# Altium PCB DueShieldL2.PcbDoc
Units mil, origin at the board's own origin, x right, y up, seen from the top; angles counter-clockwise.
Board outline 3828 x 4836 mil, 2 copper layers (Top Layer, Bottom Layer), stack 12.8 mil thick; 42 components, 59 nets, 236 pads, 89 vias.
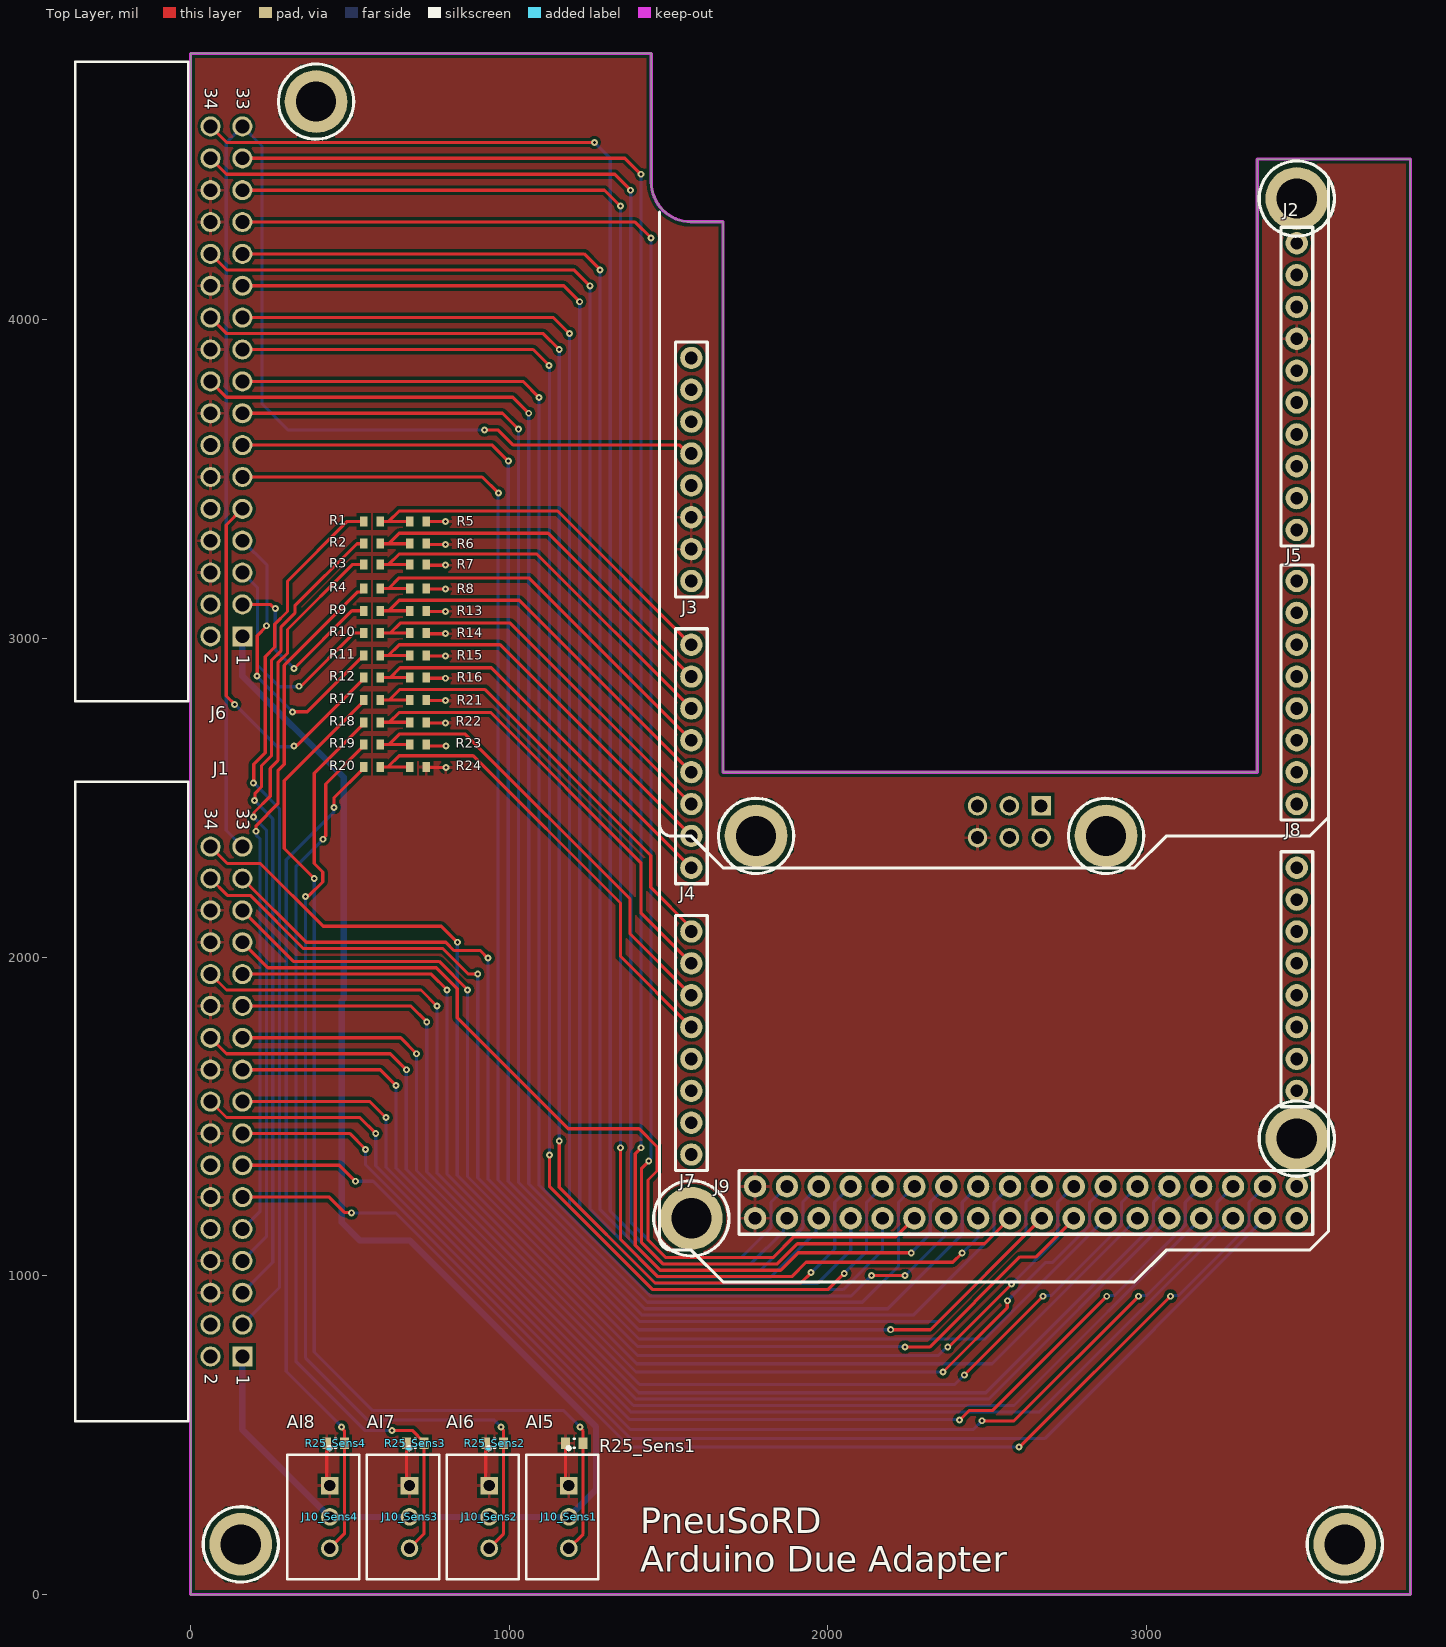
[diagram p0: Top Layer view]
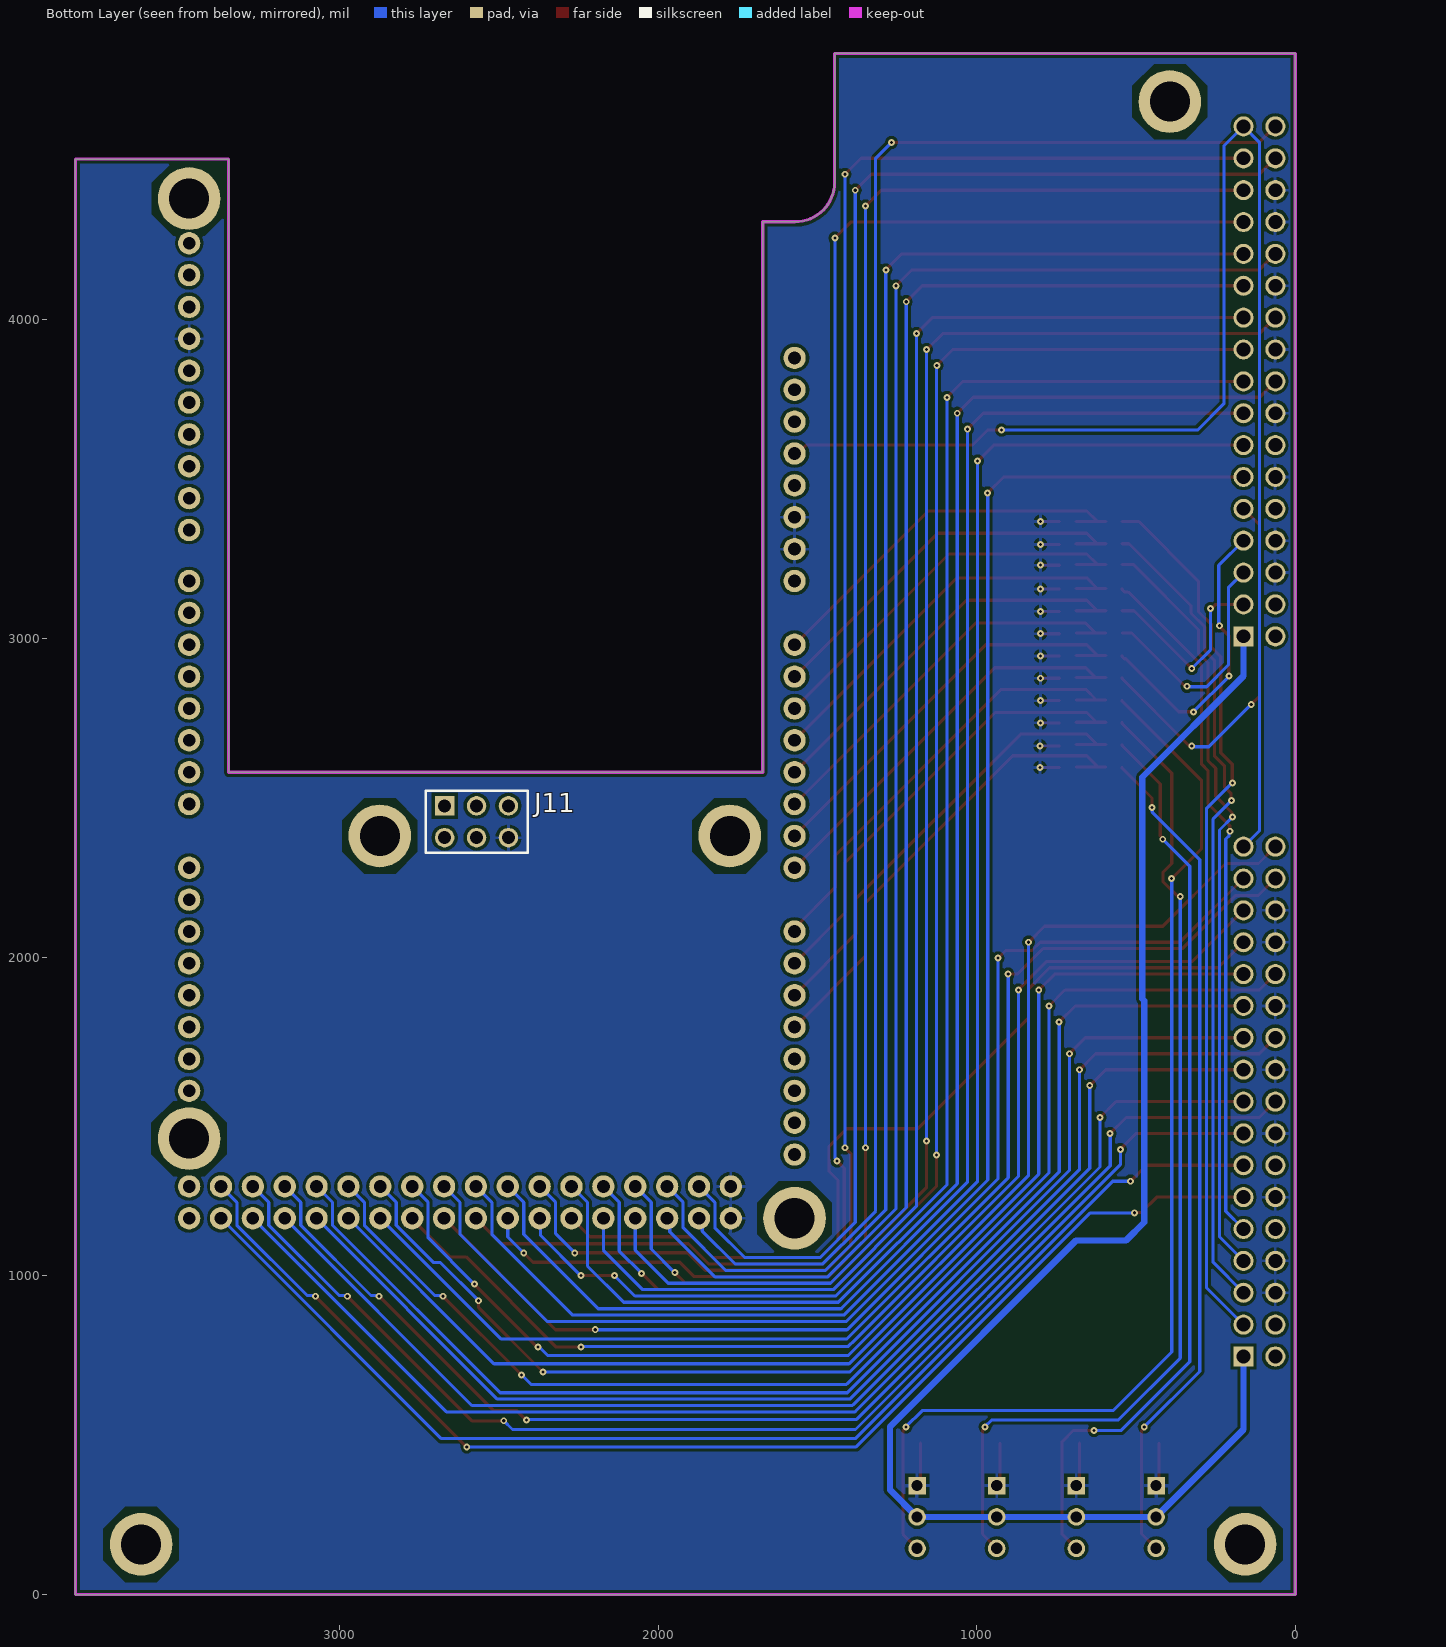
[diagram p1: Bottom Layer view, seen from below]

## Layer stack, top to bottom
Top Solder: solder mask 0.4, Solder Resist, Dk 3.5
Top Layer: signal copper 1.4
Dielectric 1: core 10, FR-4, Dk 4.2
Bottom Layer: signal copper 1.4
Solder Side: solder mask 0.4, Solder Resist, Dk 3.5

## Board outline
0.28,-0.26 0.28,4835.62 0.4,4835.74 1446.06,4835.74 1446.06,4431.57 ccw(c1570.07,4431.57) 1570.07,4307.55 1671.24,4307.55 1671.24,2579.65 1671.24,2580.39 3347.63,2580.39 3347.63,4504.4 3828.28,4504.4 3828.28,-0.26

## Design rules (kind name [scope] priority, off if disabled: settings)
BoardOutlineClearance [All] p1 off: gap=27.56 ignorepadtopadclearanceinfootprint=FALSE except(0: Arc-SplitContinuation Track-SplitContinuation SMDPad-SplitContinuation THPad-SplitContinuation Via-SplitContinuation Fill-SplitContinuation Poly-SplitContinuation Region-SplitContinuation Text-SplitContinuation)
Clearance Clearance_1 [All] p1: gap=10 ignorepadtopadclearanceinfootprint=FALSE except(0: Arc-Hole Track-Hole SMDPad-Hole THPad-Hole Via-Hole Fill-Hole Poly-Hole Region-Hole Text-Hole)
Clearance "Polygon Clearance" [InPolygon] p2: gap=15 ignorepadtopadclearanceinfootprint=TRUE
HoleSize [All] p1: absolutevalues=TRUE maxlimit=125.98 minlimit=1 maxpercent=80.000 minpercent=20.000
PolygonConnect [All] p1: connectstyle=Relief reliefconductorwidth=10 reliefentries=4 polygonreliefangle="90 Angle" airgapwidth=10
RoutingVias RoutingVias_2 [InNetClass('HC4')] p1: holewidth=31.5 width=59.06 viastyle="Through Hole" minholewidth=31.5 minwidth=59.06 maxholewidth=31.5 maxwidth=59.06
RoutingVias RoutingVias_1 [InNetClass('HC')] p2: holewidth=15.75 width=27.56 viastyle="Through Hole" minholewidth=15.75 minwidth=27.56 maxholewidth=15.75 maxwidth=27.56
RoutingVias [All] p3: holewidth=9.84 width=21.65 viastyle="Through Hole" minholewidth=9.84 minwidth=21.65 maxholewidth=9.84 maxwidth=21.65
SolderMaskExpansion [All] p1: expansion=4 istentingtop=FALSE
Width Width_2 [InNetClass('HC4')] p1: maxlimit=100 minlimit=40 preferedwidth=60 bottomlayer_minwidth=50 minimp=50.000000 maximp=50.000000 favimp=50.000000
Width Width_1 [InNetClass('HC')] p2: maxlimit=100 minlimit=30 preferedwidth=50 minimp=50.000000 maximp=50.000000 favimp=50.000000
Width [All] p3: maxlimit=20 minlimit=10 preferedwidth=15 minimp=50.000000 maximp=50.000000 favimp=50.000000
29 further rules are at their usual default settings.

## Classes and differential pairs
channel class AnalogSensors: Sens1 Sens2 Sens3 Sens4
net class AI[9..12]: AI9 AI10 AI11 AI12
component class Sens4: J10_Sens4 R25_Sens4
component class Sens3: J10_Sens3 R25_Sens3
component class Sens2: J10_Sens2 R25_Sens2
component class Sens1: J10_Sens1 R25_Sens1
component class TopSheet: J1 J2 J3 J4 J5 J6 J7 J8 J9 J11 R1 R2 R3 R4 R5 R6 R7 R8 R9 R10 R11 R12 R13 R14 R15 R16 R17 R18 R19 R20 R21 R22 R23 R24

## Components (designator, comment, footprint, x,y, rotation, side; value= is the part's Value field where it differs from the comment)
J1 "61203421721" 61203421721 -183.81,1546.74 r270 top
J2 "Header10x1" Header10x1 3471.65,4240.39 r270 top
J3 "Header8x1" Header8x1 1571.65,3880.39 r270 top
J4 "Header8x1" Header8x1 1571.65,2980.39 r270 top
J5 "Header8x1" Header8x1 3471.65,3180.39 r270 top
J6 "61203421721" 61203421721 -183.81,3806.78 r270 top
J7 "Header8x1" Header8x1 1571.65,2080.39 r270 top
J8 "Header8x1" Header8x1 3471.65,2280.39 r270 top
J9 "Header18x2" Header18x2 3471.65,1280.39 r180 top
J10_Sens1 "B3B-XH-A(LF)(SN)" FP-B3B-XH-A_LF_SN-MFG 1166.61,243.17 r270 top (schematic designator J10)
J10_Sens2 "B3B-XH-A(LF)(SN)" FP-B3B-XH-A_LF_SN-MFG 916.61,243.17 r270 top (schematic designator J10)
J10_Sens3 "B3B-XH-A(LF)(SN)" FP-B3B-XH-A_LF_SN-MFG 666.61,243.17 r270 top (schematic designator J10)
J10_Sens4 "B3B-XH-A(LF)(SN)" FP-B3B-XH-A_LF_SN-MFG 416.61,243.17 r270 top (schematic designator J10)
J11 "SSW-103-01-T-D" SMTC-SSW-103-01-X-D 2669.68,2474.87 r180 bottom
R1 "2k" RESC1608X55X25LL10T15 569.28,3367.31 r180 top
R2 "2k" RESC1608X55X25LL10T15 569.28,3297.31 r180 top
R3 "2k" RESC1608X55X25LL10T15 569.28,3232.31 r180 top
R4 "2k" RESC1608X55X25LL10T15 569.28,3156.82 r180 top
R5 "3k24" RESC1608X55X25LL10T15 714.28,3367.31 r180 top
R6 "3k24" RESC1608X55X25LL10T15 714.28,3297.7 r180 top
R7 "3k24" RESC1608X55X25LL10T15 714.28,3232.31 r180 top
R8 "3k24" RESC1608X55X25LL10T15 714.28,3156.82 r180 top
R9 "2k" RESC1608X55X25LL10T15 569.28,3086.82 r180 top
R10 "2k" RESC1608X55X25LL10T15 569.28,3017.31 r180 top
R11 "2k" RESC1608X55X25LL10T15 569.28,2946.82 r180 top
R12 "2k" RESC1608X55X25LL10T15 569.28,2877.31 r180 top
R13 "3k24" RESC1608X55X25LL10T15 714.28,3086.82 r180 top
R14 "3k24" RESC1608X55X25LL10T15 714.28,3017.31 r180 top
R15 "3k24" RESC1608X55X25LL10T15 714.28,2946.82 r180 top
R16 "3k24" RESC1608X55X25LL10T15 714.28,2877.31 r180 top
R17 "2k" RESC1608X55X25LL10T15 569.28,2806.82 r180 top
R18 "2k" RESC1608X55X25LL10T15 569.28,2736.82 r180 top
R19 "2k" RESC1608X55X25LL10T15 569.28,2666.82 r180 top
R20 "2k" RESC1608X55X25LL10T15 569.28,2596.82 r180 top
R21 "3k24" RESC1608X55X25LL10T15 714.28,2806.82 r180 top
R22 "3k24" RESC1608X55X25LL10T15 714.28,2736.82 r180 top
R23 "3k24" RESC1608X55X25LL10T15 714.28,2666.82 r180 top
R24 "3k24" RESC1608X55X25LL10T15 714.28,2596.82 r180 top
R25_Sens1 "DNP" RESC0603(1608)_L 1204.28,474.17 r180 top value="249.00 Ohm" (schematic designator R25)
R25_Sens2 "DNP" RESC0603(1608)_L 954.28,474.17 r180 top value="249.00 Ohm" (schematic designator R25)
R25_Sens3 "DNP" RESC0603(1608)_L 705.28,474.17 r180 top value="249.00 Ohm" (schematic designator R25)
R25_Sens4 "DNP" RESC0603(1608)_L 455.28,474.17 r180 top value="249.00 Ohm" (schematic designator R25)

## Footprints (in the part's own frame and the unit in brackets; to place one, negate y for a bottom-side part, rotate by r counter-clockwise, add the part's x,y. Pads: shape width x height; smd on the part's side, far side on the other; paste and mask are expansions set on the pad)
61203421721 [mm] "34 pins, right angled, gold plating"
  rect 1.6x1.6 hole 1.1: 1(20.32,8.805)
  round 1.6 hole 1.1: 2(20.32,6.265) 3(17.78,8.805) 4(17.78,6.265) 5(15.24,8.805) 6(15.24,6.265) 7(12.7,8.805) 8(12.7,6.265) 9(10.16,8.805) 10(10.16,6.265) 11(7.62,8.805) 12(7.62,6.265) 13(5.08,8.805) 14(5.08,6.265) 15(2.54,8.805) 16(2.54,6.265) 17(0,8.805) 18(0,6.265) 19(-2.54,8.805) 20(-2.54,6.265) 21(-5.08,8.805) 22(-5.08,6.265) 23(-7.62,8.805) 24(-7.62,6.265) 25(-10.16,8.805) 26(-10.16,6.265) 27(-12.7,8.805) 28(-12.7,6.265) 29(-15.24,8.805) 30(-15.24,6.265) 31(-17.78,8.805) 32(-17.78,6.265) 33(-20.32,8.805) 34(-20.32,6.265)
  silkscreen extent -25.5,-4.5 25.5,4.5, body extent -25.42,-4.42 25.42,9.13, height 9.23
FP-B3B-XH-A_LF_SN-MFG [mm]
  rect 1.4x1.4 hole 0.9 paste-1000 mask+0: 1(-2.5,0.525)
  round 1.4 hole 0.9 paste-1000 mask+0: 2(0,0.525) 3(2.5,0.525)
  silkscreen extent -5.61,-2.88 4.95,2.88, body extent -5.05,-2.98 5.05,2.98, height 0.25
Header8x1 [mil]
  round 70 hole 40: 1(0,0) 2(100,0) 3(200,0) 4(300,0) 5(400,0) 6(500,0) 7(600,0) 8(700,0)
  silkscreen extent -50,-50 750,50
Header10x1 [mil]
  round 70 hole 40: 1(0,0) 2(100,0) 3(200,0) 4(300,0) 5(400,0) 6(500,0) 7(600,0) 8(700,0) 9(800,0) 10(900,0)
  silkscreen extent -50,-50 950,50
Header18x2 [mil]
  round 70 hole 40: 1(0,0) 2(0,100) 3(100,0) 4(100,100) 5(200,0) 6(200,100) 7(300,0) 8(300,100) 9(400,0) 10(400,100) 11(500,0) 12(500,100) 13(600,0) 14(600,100) 15(700,0) 16(700,100) 17(800,0) 18(800,100) 19(900,0) 20(900,100) 21(1000,0) 22(1000,100) 23(1100,0) 24(1100,100) 25(1200,0) 26(1200,100) 27(1300,0) 28(1300,100) 29(1400,0) 30(1400,100) 31(1500,0) 32(1500,100) 33(1600,0) 34(1600,100) 35(1700,0) 36(1700,100)
  silkscreen extent -50,-50 1750,150
RESC0603(1608)_L [mm] "Chip Resistor, Body 1.6x0.8mm, IPC High Density"
  rect 0.7x0.9 smd: 1(-0.7,0) 2(0.7,0)
  silkscreen extent -0.05,-0.35 0.05,0.35, body extent -0.85,-0.47 0.85,0.47, height 0.6
RESC1608X55X25LL10T15 [mm] "Chip Resistor, 2-Leads, Body 1.60x0.80mm, IPC High Density"
  rect 0.6x0.8 smd: 1(-0.65,0) 2(0.65,0)
  body extent -0.85,-0.45 0.85,0.45, height 0.55
SMTC-SSW-103-01-X-D [mm] "SQ Post Socket, 2x3 Pins, Vertical, 2.54mm Pitch, Female"
  rect 1.55x1.55 hole 1.04: 1(0,0)
  round 1.55 hole 1.04: 2(0,-2.54) 3(2.54,0) 4(2.54,-2.54) 5(5.08,0) 6(5.08,-2.54)
  silkscreen extent -1.53,-3.74 6.61,1.2, body extent -1.52,-3.75 6.6,1.21, height 8.51

## Part data
J1 J6: library part CMP-1502-00027-1, "Male Box Header WR-BHD, THT, Angled, pitch 2.54 mm, 34 pins", Contact Resistance=20mOhm, Manufacturer="Wurth Elektronik", Operating Temperature=-40to125degC, Withstanding Voltage=500VAC, Working Voltage=250VAC, Datasheet URL=https://katalog.we-online.de/em/datasheet/6120xx21721.pdf, Gender=Male, Manufacturer URL=http://www.we-online.de, Mounting Technology=THT, Orientation=Angled, Package Reference=61203421721, Packaging=Tray, Part Number=61203421721, Pin Number=34, Pitch=2.54mm, Published Date=August2018, Publisher=WurthElektronik
J10_Sens1 J10_Sens2 J10_Sens3 J10_Sens4: library part CMP-17439-000014-1, "CONN HEADER VERT 3POS 2.5MM", Current Rating=3A, Manufacturer=JST, Package=0, Temperature="-25°C to +85°C", Temperature Range High=+85°C, Temperature Range Low=-25°C, Voltage Rating=250V, Automotive=No, Category=Conn, ComponentLink2Description=Datasheet, ComponentLink2URL=https://www.jst-mfg.com/product/pdf/eng/eXH.pdf, Conn Gender=Male, Conn Orientation=Vertical, Contact Material=Tin,Copper, Device Class L1=Connectors, Device Class L2="Headers and Wire Housings", Device Class L3=unset, Digikey Description="CONN HEADER VERT 3POS 2.5MM", Height=7mm, Lead Free=Yes, Manufacturer Part Number=B3B-XH-A(LF)(SN), Number of contacts=3, Number Of Rows=1, Octopart=https://octopart.com/b3b-xh-a%28lf%29%28sn%29-jst-3990185, Pitch=2.5mm, RoHS=TRUE
J11: library part CMP-1023-00332-1, "SQ Post Socket, Through-hole, Vertical, -55 to 105 degC, 2.54 mm Pitch, 6-Pin, Female, RoHS", Manufacturer=Samtec, Temperature Range="-55 to 105 degC", ComponentLink1Description="Manufacturer URL", ComponentLink1URL=http://www.samtec.com, ComponentLink2Description=Datasheet, ComponentLink2URL=http://www.samtec.com/documents/webfiles/pdf/SSW_TH.PDF, ComponentLink3Description="Package Specification", ComponentLink3URL=http://www.samtec.com/documents/webfiles/cpdf/SSW-1XX-XX-XXX-X-XX-XXX-XX-MKT.pdf, DatasheetVersion=F-214, Mounting Technology=Through-hole, Orientation=Vertical, PackageDescription="Assembly, Socket Strip .016 X .031 Tail", PackageReference=SSW-103-01-X-D, PackageVersion="CA, 6/1987", PartNumber=SSW-103-01-T-D, Pitch="2.54 mm", RoHS=True
R1 R2 R3 R4 R9 R10 R11 R12 R17 R18 R19 R20: library part CMP-2000-06937-1, "Chip Resistor, 2 KOhm, +/- 1%, 50 V, -55 to 155 degC, 0603 (1608 Metric), RoHS, Tape and Reel", Manufacturer=Yageo, Operating Temperature=-55°C~155°C, Package / Case=0603(1608Metric), Package Description="2-Pin Surface Mount Device, Body 1.6 x 0.8 mm", Package Reference=0603, Power (Watts)=0.1W,1/10W, Standard Package=1, Temperature Coefficient=±100ppm/°C, Tolerance=±1%, Catalog Drawings=ThickFilmResistorTopThickFilmResistorSide, Category=Resistors, Composition=ThickFilm, Datasheet URL=http://www.yageo.com/documents/recent/PYu-RC_Group_51_RoHS_L_7.pdf, Datasheet Version="Rev. 7, 05/2017", EDA / CAD Models=DownloadfromAcceleratedDesigns, Family=ChipResistor-SurfaceMount, Features=MoistureResistant, Height="0.022\"(0.55mm)", HTML Datasheet=RCSeries,LSuffixDatasheet.html, Kits=PHH4-KIT-ND-RESKIT1K-9.76K1/10W5700PCS, Manufacturer URL=http://www.yageo.com/, Mounting Technology=SurfaceMount, Number of Terminations=2, Online Catalog=RC0603Series, Other Names=311-2.00KHRCT, Packaging=CutTape(CT), PCN Other=RC/AC0603/0805/120622/Jan/2013, Product Training Modules=ChipResistor, Resistance (Ohms)=2k, Series=RC, Size / Dimension="0.063\"Lx0.031\"W(1.60mmx0.80mm)", Supplier Device Package=0603
R5 R6 R7 R8 R13 R14 R15 R16 R21 R22 R23 R24: library part CMP-2000-06937-1, "Chip Resistor, 3K24Ohm, +/- 1%, 50 V, -55 to 155 degC, 0603 (1608 Metric), RoHS, Tape and Reel NOTE: This part has been picked wrong", Manufacturer=Yageo, Operating Temperature=-55°C~155°C, Package / Case=0603(1608Metric), Package Description="2-Pin Surface Mount Device, Body 1.6 x 0.8 mm", Package Reference=0603, Power (Watts)=0.1W,1/10W, Resistance (Ohms)=2k, Standard Package=1, Temperature Coefficient=±100ppm/°C, Tolerance=±1%, Catalog Drawings=ThickFilmResistorTopThickFilmResistorSide, Category=Resistors, Composition=ThickFilm, Datasheet URL=http://www.yageo.com/documents/recent/PYu-RC_Group_51_RoHS_L_7.pdf, Datasheet Version="Rev. 7, 05/2017", EDA / CAD Models=DownloadfromAcceleratedDesigns, Family=ChipResistor-SurfaceMount, Features=MoistureResistant, Height="0.022\"(0.55mm)", HTML Datasheet=RCSeries,LSuffixDatasheet.html, Kits=PHH4-KIT-ND-RESKIT1K-9.76K1/10W5700PCS, Manufacturer URL=http://www.yageo.com/, Mounting Technology=SurfaceMount, Number of Terminations=2, Online Catalog=RC0603Series, Other Names=311-2.00KHRCT, Packaging=CutTape(CT), PCN Other=RC/AC0603/0805/120622/Jan/2013, Product Training Modules=ChipResistor, Series=RC, Size / Dimension="0.063\"Lx0.031\"W(1.60mmx0.80mm)", Supplier Device Package=0603
R25_Sens1 R25_Sens2 R25_Sens3 R25_Sens4: library part CMP-1012-00440-1, "249R 0.1W 1% 0603 (1608 Metric)  SMD", Case-EIA=0603, Case-Metric=1608, Power="0.1 W", Tolerance="1 %", Technology=SMT

## Free pads (board coordinates)
  round 196.85 hole 125.98: 5(157.76,157.22) 5(393.98,4684.78) 5(1571.65,1180.39) 5(1774.8,2380.39) 5(2873.22,2380.39) 5(3471.65,1430.39) 5(3471.65,4380.39) 5(3622.33,157.22)

## Via types
v1: diameter 21.65, hole 9.84, Top Layer to Bottom Layer, 89 vias

## Nets (pads, with @x,y where several pads share a name; then routed paths per layer and width w, separated by ;. In a path a pad name is that pad's centre, name@x,y a point inside that pad or via, vN(x,y) a via of type N, cw(c..) or ccw(c..) an arc to the next point about the centre after c; other vN are vias at no path point)
+3V3: J1.33 J3.4 J6.33 | length 4611.3
  Top Layer w10: v1(922.28,3653.74) 966.28,3653.74 1013.24,3606.78 1535.79,3606.78 1562.18,3580.39 J3.4
  Bottom Layer w10: J1.33 112.28,2397.3 112.28,4556.22 J6.33 224.28,4545.34 224.28,3736.74 307.28,3653.74 v1(922.28,3653.74)
  Bottom Layer w15: v1@922.28,3651.94 v1(922.28,3653.74)
+5: J1.1 J6.1 J10_Sens1.2 J10_Sens2.2 J10_Sens3.2 J10_Sens4.2 | length 4723
  Bottom Layer w20: J1.1 162.84,517.61 J10_Sens4.2 J10_Sens3.2 J10_Sens2.2 J10_Sens1.2 1272.28,328.17 1272.28,526.6 688.39,1110.49 531.43,1110.49 474.28,1167.64 474.28,1862.68 480.83,1869.22 480.83,2564.27 162.84,2882.25 J6.1
A1: J4.1 R1.1 R5.2 | length 1230.5
  Top Layer w10: R1.1 622.31,3367.31 ; R5.2 622.31,3367.31 ; J4.1 1152.03,3400 655,3400 622.31,3367.31
A2: J4.2 R2.1 R6.2 | length 1243.1
  Top Layer w10: R2.1 622.31,3297.31 ; R6.2 688.31,3297.31 622.31,3297.31 ; J4.2 1122.03,3330 655,3330 622.31,3297.31
A3: J4.3 R3.1 R7.2 | length 1257.4
  Top Layer w10: R3.1 622.31,3232.31 ; R7.2 622.31,3232.31 ; J4.3 1087.03,3265 655,3265 622.31,3232.31
A4: J4.4 R4.1 R8.2 | length 1268.5
  Top Layer w10: R4.1 621.82,3156.82 ; R8.2 621.82,3156.82 ; J4.4 1062.03,3190 655,3190 621.82,3156.82
A5: J4.5 R9.1 R13.2 | length 1280.9
  Top Layer w10: R9.1 621.82,3086.82 ; R13.2 621.82,3086.82 ; J4.5 1032.03,3120 655,3120 621.82,3086.82
A6: J4.6 R10.1 R14.2 | length 1285.7
  Top Layer w10: R10.1 627.68,3017.31 ; R14.2 627.68,3017.31 ; J4.6 1003.97,3048.06 658.43,3048.06 627.68,3017.31
A7: J4.7 R11.1 R15.2 | length 1306.5
  Top Layer w10: R11.1 621.43,2946.82 ; R15.2 621.43,2946.82 ; J4.7 971.65,2980.39 655,2980.39 621.43,2946.82
A8: J4.8 R12.1 R16.2 | length 1311.6
  Top Layer w10: R12.1 626.57,2877.31 ; R16.2 626.57,2877.31 ; J4.8 943.97,2908.06 657.32,2908.06 626.57,2877.31
A9: J7.1 R17.1 R21.2 | length 1434.7
  Top Layer w10: R17.1 624.14,2806.82 ; R21.2 624.14,2806.82 ; J7.1 1571.65,2091.38 1444.28,2218.74 1444.28,2318.74 923.02,2840 657.32,2840 624.14,2806.82
A10: J7.2 R18.1 R22.2 | length 1472.5
  Top Layer w10: R18.1 624.27,2736.82 ; R22.2 624.27,2736.82 ; J7.2 1413.28,2138.75 1413.28,2296.74 942.46,2767.56 655.01,2767.56 624.27,2736.82
A11: J7.3 R19.1 R23.2 | length 1463.3
  Top Layer w10: R19.1 621.82,2666.82 ; R23.2 621.82,2666.82 ; J7.3@1569.64,1880.39 J7.3 1379.28,2072.75 1379.28,2182.75 862.03,2700 655,2700 621.82,2666.82
A12: J7.4 R20.1 R24.2 | length 1521.3
  Top Layer w10: R20.1 619.67,2596.82 ; R24.2 619.67,2596.82 ; J7.4@1561.37,1780.39 J7.4 1349.28,2002.75 1349.28,2169.74 886.88,2632.14 655,2632.14 619.67,2596.82
AI1: J1.3 R1.2 | length 2777.3
  Top Layer w10: v1(197.08,2546.74) 198.28,2547.94 198.28,2605.2 234.28,2641.2 234.28,2943.1 264.28,2973.1 264.28,3044.63 304.28,3084.63 304.28,3179.48 492.12,3367.31 R1.2
  Bottom Layer w10: J1.3 279.28,963.18 279.28,2465.74 198.28,2546.74 v1(197.08,2546.74)
AI2: J1.5 R2.2 | length 2568.9
  Top Layer w10: v1(200.29,2491.66) 202.52,2493.89 202.52,2514.09 222.91,2534.48 222.91,2600.77 254.28,2632.14 254.28,2932 284.28,2962 284.28,3036.34 327.51,3079.57 327.51,3102.51 522.31,3297.31 R2.2
  Bottom Layer w10: J1.5 258.28,1042.18 258.28,2433.67 v1(200.29,2491.66)
AI3: J1.7 R3.2 | length 2398
  Top Layer w10: v1(197.12,2440.1) 199.35,2442.33 199.35,2453.81 250.06,2504.51 250.06,2592.31 274.28,2616.54 274.28,2923.71 304.28,2953.71 304.28,3028.06 508.54,3232.31 R3.2
  Bottom Layer w10: J1.7 238.28,1122.18 238.28,2398.94 v1(197.12,2440.1)
AI4: J1.9 R4.2 | length 2185.2
  Top Layer w10: v1(205.79,2394.91) 205.79,2412.25 274.28,2480.74 274.28,2584.74 294.28,2604.74 294.28,2915.43 324.28,2945.43 524.92,3146.07 536.88,3146.07 543.69,3152.88 R4.2
  Bottom Layer w10: J1.9 218.28,1202.18 218.28,2370.76 208.02,2381.02 208.02,2392.68 v1(205.79,2394.91)
AI5: J6.3 R9.2 | length 614.7
  Top Layer w10: J6.3 250.06,3106.78 262.96,3093.88 v1(266.11,3093.88) ; v1(325.28,2905.74) 506.36,3086.82 R9.2
  Bottom Layer w10: v1(266.11,3093.88) 266.11,2964.91 v1(325.28,2905.74)
AI6: J6.5 R10.2 | length 741.8
  Top Layer w10: J6.5 J6.5@163.12,3207.06 ; v1(340,2850) 342.23,2852.23 349.17,2852.23 514.25,3017.31 R10.2
  Bottom Layer w10: J6.5 210.28,3159.34 210.28,2916.74 278.64,2848.39 338.39,2848.39 v1(340,2850)
AI7: J6.7 R11.2 | length 931.1
  Top Layer w10: v1(208.18,2882.32) 209.34,2883.48 209.34,3008.8 238.46,3037.91 v1(238.46,3039.74) ; v1@322.34,2767.55 v1(320.11,2769.78) 366.66,2769.78 532.94,2936.07 536.88,2936.07 543.69,2942.88 R11.2
  Bottom Layer w10: J6.7 240.28,3229.34 240.28,3041.57 v1(238.46,3039.74) ; v1(208.18,2882.32) 208.18,2882.01 320.11,2770.08 v1(320.11,2769.78)
AI8: J6.9 R12.2 | length 1198.2
  Top Layer w10: v1(138.61,2793.07) 112.17,2819.5 112.17,3356.11 J6.9 ; v1(325.28,2662.88) 327.51,2665.11 335.43,2665.11 543.69,2873.37 R12.2
  Bottom Layer w10: v1(138.61,2793.07) 271.68,2660 322.4,2660 v1(325.28,2662.88)
AI9: J10_Sens1.3 R17.2 R25_Sens1.1 | length 3523.1
  Top Layer w10: v1(388.28,2246.74) 294.28,2340.74 294.28,2553.47 543.69,2802.88 R17.2 ; J10_Sens1.3 1231.84,189.3 R25_Sens1.1 1231.84,513.03 1222.28,522.59 v1(1222.28,525.74)
  Bottom Layer w10: v1(388.28,2246.74) 388.28,760.72 572.27,576.74 1171.28,576.74 v1(1222.28,525.74)
AI10: J10_Sens2.3 R18.2 R25_Sens2.1 | length 3201.3
  Top Layer w10: v1(361.28,2189.74) 363.51,2191.97 371.11,2191.97 415,2235.86 415,2266.98 388.28,2293.7 388.28,2577.47 543.69,2732.88 R18.2 ; J10_Sens2.3 981.84,189.3 R25_Sens2.1 ; v1(974.28,525.74) 974.28,522.59 981.84,515.03 R25_Sens2.1@981.84,475.17
  Bottom Layer w10: v1(361.28,2189.74) 361.28,741.74 555.17,547.86 952.17,547.86 v1(974.28,525.74)
AI11: J10_Sens3.3 R19.2 R25_Sens3.1 | length 2883.1
  Top Layer w10: v1(416.28,2370) 416.28,2373.15 424.17,2381.04 424.17,2543.36 543.69,2662.88 R19.2 ; v1(632.14,514.73) 696.21,514.73 732.84,478.1 R25_Sens3.1 732.84,190.3 J10_Sens3.3
  Bottom Layer w10: v1(416.28,2370) 331.28,2285 331.28,729.74 546.29,514.73 v1(632.14,514.73)
AI12: J10_Sens4.3 R20.2 R25_Sens4.1 | length 2647.4
  Top Layer w10: J10_Sens4.3 482.84,190.3 R25_Sens4.1 482.84,514.03 474.28,522.59 v1(474.28,525.74) ; v1(450,2470) 450,2499.19 543.69,2592.88 R20.2
  Bottom Layer w10: v1(450,2470) 449.28,2469.28 449.28,2455 300.28,2306 300.28,699.74 v1(474.28,525.74)
DIO1: J1.11 J9.3 | length 3914
  Top Layer w10: J1.11 435.2,1246.74 483.05,1198.89 503.79,1198.89 v1(505.11,1197.57) ; v1(2600.28,463.08) 2602.62,463.08 v1(3075.28,935.74)
  Bottom Layer w10: v1(505.11,1197.57) 506.02,1196.66 644.86,1196.66 1352.61,488.91 1378.44,463.08 v1(2600.28,463.08) ; v1(3075.28,935.74) 3077.51,937.97 3100.95,937.97 3321.65,1158.67 3321.65,1230.39 J9.3
DIO2: J1.13 J9.4 | length 3850.6
  Top Layer w10: J1.13 467.2,1346.74 v1(517.28,1296.66)
  Bottom Layer w10: v1(517.28,1296.66) 573.14,1296.66 1377.97,491.84 1380.9,488.91 2680.17,488.91 J9.4
DIO3: J1.15 J9.5 | length 3879.8
  Top Layer w10: J1.15 499.2,1446.74 v1(549.28,1396.66) ; v1(2484.21,544.99) 2484.46,544.74 2584.28,544.74 v1(2975.28,935.74)
  Bottom Layer w10: v1(549.28,1396.66) 549.28,1348.8 1380.42,517.66 2456.88,517.66 v1(2484.21,544.99) ; v1(2975.28,935.74) 2977.51,937.97 3000.95,937.97 3221.65,1158.67 3221.65,1230.39 J9.5
DIO4: J1.17 J9.6 | length 3854.8
  Top Layer w10: J1.17 563.24,1546.74 ; 563.24,1546.7 v1(613.28,1496.66)
  Bottom Layer w10: v1(613.28,1496.66) 613.28,1341.37 1378.82,575.84 1381.75,572.91 2664.17,572.91 J9.6
DIO5: J1.18 J9.7 | length 3928.1
  Top Layer w10: J1.18 112.88,1496.7 531.24,1496.7 v1(581.28,1446.66) ; v1(2413.28,547.08) 2442.94,576.74 2516.28,576.74 v1(2875.28,935.74)
  Bottom Layer w10: v1(581.28,1446.66) 581.28,1345.09 1366.1,560.27 1377.06,549.31 2411.05,549.31 v1(2413.28,547.08) ; v1(2875.28,935.74) 2877.51,937.97 2900.95,937.97 3121.65,1158.67 3121.65,1230.39 J9.7
DIO6: J1.19 J9.8 | length 3840.4
  Top Layer w10: J1.19 595.24,1646.7 v1(645.28,1596.66)
  Bottom Layer w10: v1(645.28,1596.66) 645.28,1427.74 645.28,1337.66 1387.1,595.84 1390.03,592.91 2584.17,592.91 J9.8
DIO7: J1.21 J9.9 | length 3895
  Top Layer w10: J1.21 659.2,1746.74 v1(709.28,1696.66)
  Bottom Layer w10: v1(709.28,1696.66) 709.28,1439.74 709.28,1330.22 1403.67,635.84 1406.6,632.91 2495.88,632.91 3021.65,1158.67 3021.65,1230.39 J9.9
DIO8: J1.22 J9.10 | length 3896.7
  Top Layer w10: J1.22 112.88,1696.7 627.24,1696.7 v1(677.28,1646.66)
  Bottom Layer w10: v1(677.28,1646.66) 677.28,1435.74 677.28,1333.94 1395.39,615.84 1398.32,612.91 2504.17,612.91 J9.10
DIO9: J1.23 J9.11 | length 3875.8
  Top Layer w10: J1.23 691.24,1846.74 ; 691.24,1846.7 v1(741.28,1796.66) ; v1(2428.28,688.74) v1(2675.28,935.74)
  Bottom Layer w10: v1(741.28,1796.66) 741.28,1427.74 741.28,1326.51 1406.13,661.66 1409.06,658.73 2398.28,658.73 v1(2428.28,688.74) ; v1(2675.28,935.74) 2677.51,937.97 2700.95,937.97 2921.65,1158.67 2921.65,1230.39 J9.11
DIO10: J1.25 J9.12 | length 3842.7
  Top Layer w10: J1.25 162.88,1946.7 755.24,1946.7 v1(805.28,1896.66)
  Bottom Layer w10: v1(805.28,1896.66) 805.28,1473.74 805.28,1319.08 1397.53,726.84 1400.45,723.91 2515.17,723.91 J9.12
DIO11: J1.26 J9.13 | length 3928.8
  Top Layer w10: J1.26 112.88,1896.7 723.24,1896.7 v1(773.28,1846.66) ; v1(2361.28,698.08) 2563.28,900.08 v1(2563.28,921.74)
  Bottom Layer w10: v1(773.28,1846.66) 773.28,1473.74 773.28,1322.79 1398,698.08 v1(2361.28,698.08) ; v1(2563.28,921.74) 2682.86,1041.32 2704.3,1041.32 2821.65,1158.67 2821.65,1230.39 J9.13
DIO12: J1.32 J9.14 | length 3938.2
  Top Layer w10: J1.32 115.85,2193.73 187.56,2193.73 354.64,2026.66 792.47,2026.66 872.47,1946.66 v1(901.28,1946.66)
  Bottom Layer w10: v1(901.28,1946.66) 901.28,1307.93 1404.38,804.84 1407.31,801.91 2493.17,801.91 J9.14
DIO13: J1.34 J9.15 | length 4085.1
  Top Layer w10: J1.34 115.89,2293.7 219.25,2293.7 416.28,2096.66 787.28,2096.66 v1(837.28,2046.66) ; v1(2376.28,776.08) 2378.62,776.08 v1(2576.28,973.74)
  Bottom Layer w10: v1(837.28,2046.66) 837.28,1315.36 1399.81,752.84 1402.74,749.91 2346.45,749.91 2374.45,777.91 v1(2376.28,776.08) ; v1(2576.28,973.74) 2721.65,1119.1 2721.65,1230.39 J9.15
DIO14: J6.11 J9.17 | length 5104.9
  Top Layer w10: J6.11@162.84,3506.78 915.2,3506.78 965.28,3456.7 v1(966.11,3456.7)
  Bottom Layer w10: v1(966.11,3456.7) 965.28,3455.87 965.28,1300.5 1406.21,859.57 1409.14,856.64 2347.9,856.64 2621.65,1130.39 2621.65,1150.72 2621.65,1230.39 J9.17
DIO15: J6.13 J9.19 | length 5089.3
  Top Layer w10: J6.13@162.84,3606.74 947.24,3606.74 v1(997.28,3556.7)
  Bottom Layer w10: v1(997.28,3556.7) 997.28,1401.74 997.28,1296.78 1414.5,879.57 1417.43,876.64 2267.9,876.64 2521.65,1130.39 2521.65,1230.39 J9.19
DIO16: J6.15 J9.21 | length 5074.9
  Top Layer w10: J6.15@162.84,3706.78 979.2,3706.78 v1(1029.28,3656.7)
  Bottom Layer w10: v1(1029.28,3656.7) 1029.28,1401.74 1029.28,1293.07 1422.78,899.57 1425.71,896.64 2187.9,896.64 2421.65,1130.39 2421.65,1230.39 J9.21
DIO17: J6.17 J9.24 | length 4975.8
  Top Layer w10: J6.17@162.84,3806.78 1043.24,3806.78 ; 1043.24,3806.74 v1(1093.28,3756.7) ; v1(2136.65,1000.39) v1(2242.28,1000.39)
  Bottom Layer w10: v1(1093.28,3756.7) 1093.28,1401.74 1093.28,1285.64 1439.35,939.57 1442.28,936.64 2072.9,936.64 v1(2136.65,1000.39) ; v1(2242.28,1000.39) 2369.13,1127.23 2369.13,1177.87 J9.24
DIO18: J6.18 J9.25 | length 5088.8
  Top Layer w10: J6.18 112.17,3757.45 ; 112.88,3756.74 1011.24,3756.74 v1(1061.28,3706.7)
  Bottom Layer w10: v1(1061.28,3706.7) 1061.28,1401.74 1061.28,1289.35 1431.07,919.57 1434,916.64 2107.9,916.64 2221.65,1030.39 2221.65,1150.72 2221.65,1230.39 J9.25
DIO19: J6.19 J9.27 | length 4962.4
  Top Layer w10: J6.19@162.84,3906.74 1075.24,3906.74 v1(1125.28,3856.7) ; v1(1126.28,1378.74) 1126.28,1280.48 1449.37,957.39 2001.65,957.39 v1(2051.65,1007.39)
  Bottom Layer w10: v1(1125.28,3856.7) 1126.28,3855.7 v1(1126.28,1378.74) ; v1(2051.65,1007.39) 2121.65,1077.39 2121.65,1230.39 J9.27
DIO20: J6.21 J9.28 | length 5027.8
  Top Layer w10: J6.21@162.84,4006.78 1139.2,4006.78 v1(1189.28,3956.7)
  Bottom Layer w10: v1(1189.28,3956.7) 1189.28,1401.74 1189.28,1217.92 1447.63,959.57 1450.56,956.64 2047.9,956.64 2171.65,1080.39 J9.28
DIO21: J6.22 J9.29 | length 5014
  Top Layer w10: J6.22 112.29,3957.33 ; 112.88,3956.74 1107.24,3956.74 v1(1157.28,3906.7) ; v1(1157.28,1422.74) 1157.28,1277.76 1457.66,977.39 1914.9,977.39 v1(1947.5,1009.99)
  Bottom Layer w10: v1(1157.28,1422.74) v1(1157.28,3906.7) ; v1(1947.5,1009.99) 2021.65,1084.13 2021.65,1150.72 2021.65,1230.39 J9.29
DIO22: J6.23 J9.30 | length 5013.4
  Top Layer w10: J6.23@162.84,4106.78 1171.24,4106.78 ; 1171.24,4106.74 v1(1221.28,4056.7)
  Bottom Layer w10: v1(1221.28,4056.7) 1221.28,1401.74 1221.28,1214.2 1455.92,979.57 1458.85,976.64 1967.9,976.64 2071.65,1080.39 J9.30
DIO23: J6.25 J9.31 | length 5014.1
  Top Layer w10: J6.25@162.84,4206.74 1235.24,4206.74 v1(1285.28,4156.7)
  Bottom Layer w10: v1(1285.28,4156.7) 1285.28,1401.74 1285.28,1206.77 1472.49,1019.57 1475.42,1016.64 1787.56,1016.64 1921.65,1150.72 1921.65,1230.39 J9.31
DIO24: J6.26 J9.32 | length 5030.9
  Top Layer w10: J6.26 112.88,4156.74 162.84,4156.74 1203.24,4156.74 v1(1253.28,4106.7)
  Bottom Layer w10: v1(1253.28,4106.7) 1253.28,1401.74 1253.28,1210.49 1464.2,999.57 1467.13,996.64 1821.65,996.64 1963.16,1138.16 1963.16,1171.9 J9.32
DIO25: J6.32 J9.33 | length 5274.2
  Top Layer w10: J6.32 112.88,4456.74 1331.24,4456.74 v1(1381.28,4406.7)
  Bottom Layer w10: v1(1381.28,4406.7) 1381.28,1401.74 1381.28,1167.34 1491.24,1057.39 1728.31,1057.39 1821.65,1150.72 1821.65,1230.39 J9.33
DIO26: J6.34 J9.34 | length 5299.3
  Top Layer w10: J6.34@62.84,4606.78 112.88,4556.74 v1(1267.28,4556.7)
  Bottom Layer w10: v1(1267.28,4556.7) 1317.28,4506.7 1317.28,1203.06 1361.28,1159.06 1482.95,1037.39 1758.65,1037.39 1861.29,1140.03 1861.29,1170.03 J9.34
GND: J1.6 J1.8 J1.12 J1.16 J1.20 J1.24 J1.28 J1.30 J2.4 J3.6 J3.7 J6.6 J6.8 J6.12 J6.16 J6.20 J6.24 J6.28 J6.30 J9.35 J9.36 J10_Sens1.1 J10_Sens2.1 J10_Sens3.1 J10_Sens4.1 J11.6 R5.1 R6.1 R7.1 R8.1 R13.1 R14.1 R15.1 R16.1 R21.1 R22.1 R23.1 R24.1 R25_Sens1.2 R25_Sens2.2 R25_Sens3.2 R25_Sens4.2 | length 1268.5
  Top Layer w10: R25_Sens4.2 427.72,351.15 J10_Sens4.1 ; R25_Sens3.2 677.72,351.15 J10_Sens3.1 ; R22.1@739.87,2735 v1(800,2735) ; R21.1@739.87,2805 v1(800,2805) ; R16.1@739.87,2875 v1(800,2875) ; R15.1@739.87,2945 v1(800,2945) ; R14.1@739.87,3015 v1(800,3015) ; R13.1@739.87,3085 v1(800,3085) ; R8.1@739.87,3155 v1(800,3155) ; R7.1@739.87,3230 v1(800,3230) ; R6.1@739.87,3295 v1(800,3295) ; R5.1 v1(800,3367.31) ; R24.1@741.16,2595 v1(801.28,2595) ; R23.1@741.16,2662.88 v1(801.28,2662.88) ; R25_Sens2.2 926.72,352.15 J10_Sens2.1 ; R25_Sens1.2 1176.72,352.15 J10_Sens1.1
PWM1: J1.29 J9.16 | length 3688.9
  Top Layer w10: J1.29 322.88,1986.7 780.05,1986.7 869.28,1897.47 v1(869.28,1896.66) ; v1(2242.28,776.08) 2319.32,776.08 2602.62,1059.39 2653.65,1059.39 2771.65,1177.39 J9.16
  Bottom Layer w10: v1(869.28,1896.66) 869.28,1311.65 1383.35,797.57 1402.62,778.31 2240.05,778.31 v1(2242.28,776.08)
PWM2: J1.31 J9.18 | length 3645.7
  Top Layer w10: J1.31 362.92,2046.66 800.76,2046.66 826.59,2020.84 909.11,2020.84 v1(933.28,1996.66) ; v1(2197.28,830.81) 2322.07,830.81 J9.18
  Bottom Layer w10: v1(933.28,1996.66) 933.28,1304.21 1406.69,830.81 v1(2197.28,830.81)
PWM3: J6.27 J9.20 | length 6293.5
  Top Layer w10: J6.27@162.84,4306.74 1267.24,4306.74 ; 684.54,4306.74 1395.24,4306.74 v1(1445.28,4256.7) ; v1(1438.11,1359.74) 1415.65,1337.27 1415.65,1104.25 1482.51,1037.39 1841.65,1037.39 1904.65,1100.39 2491.65,1100.39 J9.20
  Bottom Layer w10: v1(1438.11,1359.74) 1438.11,1362.89 1445.28,1370.06 v1(1445.28,4256.7)
PWM4: J6.29 J9.22 | length 5730.8
  Top Layer w10: J6.29@162.84,4406.74 1299.24,4406.74 v1(1349.28,4356.7) ; v1(1349.28,1401.74) 1349.28,1114.05 1465.94,997.39 1886.5,997.39 1931.5,1042.39 2392.47,1042.39 v1(2421.65,1071.56)
  Bottom Layer w10: v1(1349.28,1401.74) v1(1349.28,4356.7) ; v1(2421.65,1071.56) 2471.65,1121.56 J9.22
PWM5: J6.31 J9.23 | length 5815.3
  Top Layer w10: J6.31 1363.2,4506.78 v1(1413.28,4456.7) ; v1(1413.28,1401.74) 1413.28,1400.49 1395.65,1382.85 1395.65,1095.97 1474.23,1017.39 1851.65,1017.39 1906.65,1072.39 2260.82,1072.39 v1(2261.65,1071.56)
  Bottom Layer w10: v1(1413.28,1401.74) v1(1413.28,4456.7) ; v1(2261.65,1071.56) 2261.65,1072.39 2321.65,1132.39 2321.65,1230.39 J9.23
PWMM: J1.27 J9.26 | length 2834.6
  Top Layer w10: J1.27 242.88,1966.7 771.77,1966.7 837.28,1901.19 837.28,1809.66 1185.56,1461.39 1407.65,1461.39 1463.94,1405.09 1463.94,1328.74 1435.65,1300.44 1435.65,1112.53 1490.79,1057.39 1828.65,1057.39 1893.65,1122.39 2213.65,1122.39 J9.26
pads on no net: J1.2 J1.4 J1.10 J1.14 J2.1 J2.2 J2.3 J2.5 J2.6 J2.7 J2.8 J2.9 J2.10 J3.1 J3.2 J3.3 J3.5 J3.8 J5.1 J5.2 J5.3 J5.4 J5.5 J5.6 J5.7 J5.8 J6.2 J6.4 J6.10 J6.14 J7.5 J7.6 J7.7 J7.8 J8.1 J8.2 J8.3 J8.4 J8.5 J8.6 J8.7 J8.8 J9.1 J9.2 J11.1 J11.2 J11.3 J11.4 J11.5

## Polygon pours and split planes (outlines as drawn)
GND on Bottom Layer "Ground Plane-GND" (solid, remove dead copper, pour order 140): 0,4835 1,4836 1470.84,4836 1470.84,4530.91 1670.84,4330.91 1670.84,2580.39 3349.6,2580.39 3349.6,4503.42 3828.28,4503.42 3828.28,0 0,0
GND on Top Layer "Ground Plane-GND" (solid, remove dead copper, pour order 134): 0,4835 1,4836 1470.84,4836 1470.84,4530.91 1670.84,4330.91 1670.84,2580.39 3348.61,2580.39 3348.61,4503.42 3828.28,4503.42 3828.28,0 0,0

## Keep-outs
Keep-Out Layer:
  lines w10: 0.28,4835.62 0.28,-0.26 3828.28,-0.26 3828.28,4504.4 3347.63,4504.4 3347.63,2580.39 1671.24,2580.39 ; 0.4,4835.74 1446.06,4835.74 1446.06,4431.57 ccw(c1570.07,4431.57) 1570.07,4307.55 1671.24,4307.55 1671.24,2579.65

## Other copper
Top Layer:
  pour cut-out: 2824.01,2498.35 2922.43,2498.35 2991.33,2429.45 2991.33,2331.03 2922.43,2262.13 2824.01,2262.13 2755.11,2331.03 2755.11,2429.45
  pour cut-out: 1725.58,2498.35 1824.01,2498.35 1892.91,2429.45 1892.91,2331.03 1824.01,2262.13 1725.58,2262.13 1656.69,2331.03 1656.69,2429.45
  pour cut-out: 3422.43,4498.35 3520.86,4498.35 3589.76,4429.45 3589.76,4331.03 3520.86,4262.13 3422.43,4262.13 3353.54,4331.03 3353.54,4429.45
  pour cut-out: 3422.43,1548.35 3520.86,1548.35 3589.76,1479.45 3589.76,1381.03 3520.86,1312.13 3422.43,1312.13 3353.54,1381.03 3353.54,1479.45
  pour cut-out: 3573.12,275.19 3671.54,275.19 3740.44,206.29 3740.44,107.86 3671.54,38.97 3573.12,38.97 3504.22,107.86 3504.22,206.29
  pour cut-out: 108.55,275.19 206.98,275.19 275.87,206.29 275.87,107.86 206.98,38.97 108.55,38.97 39.65,107.86 39.65,206.29
  pour cut-out: 344.77,4802.75 443.2,4802.75 512.09,4733.85 512.09,4635.42 443.2,4566.53 344.77,4566.53 275.87,4635.42 275.87,4733.85
Bottom Layer:
  pour cut-out: 344.77,4802.75 443.2,4802.75 512.09,4733.85 512.09,4635.42 443.2,4566.53 344.77,4566.53 275.87,4635.42 275.87,4733.85
  pour cut-out: 108.55,275.19 206.98,275.19 275.87,206.29 275.87,107.86 206.98,38.97 108.55,38.97 39.65,107.86 39.65,206.29
  pour cut-out: 3573.12,275.19 3671.54,275.19 3740.44,206.29 3740.44,107.86 3671.54,38.97 3573.12,38.97 3504.22,107.86 3504.22,206.29
  pour cut-out: 3422.43,1548.35 3520.86,1548.35 3589.76,1479.45 3589.76,1381.03 3520.86,1312.13 3422.43,1312.13 3353.54,1381.03 3353.54,1479.45
  pour cut-out: 3422.43,4498.35 3520.86,4498.35 3589.76,4429.45 3589.76,4331.03 3520.86,4262.13 3422.43,4262.13 3353.54,4331.03 3353.54,4429.45
  pour cut-out: 2824.01,2498.35 2922.43,2498.35 2991.33,2429.45 2991.33,2331.03 2922.43,2262.13 2824.01,2262.13 2755.11,2331.03 2755.11,2429.45
  pour cut-out: 1725.58,2498.35 1824.01,2498.35 1892.91,2429.45 1892.91,2331.03 1824.01,2262.13 1725.58,2262.13 1656.69,2331.03 1656.69,2429.45
  pour cut-out: 1522.43,1298.35 1620.86,1298.35 1689.76,1229.45 1689.76,1131.03 1620.86,1062.13 1522.43,1062.13 1453.54,1131.03 1453.54,1229.45

## Silkscreen, mask and mechanical layers (free items; w line width, h text height)
Top Overlay:
  circle w10: c393.98,4684.78 r118.11
  circle w10: c157.76,157.22 r118.11
  circle w10: c3622.33,157.22 r118.11
  circle w10: c3471.65,1430.39 r118.11
  circle w10: c3471.65,4380.39 r118.11
  circle w10: c2873.22,2380.39 r118.11
  circle w10: c1774.8,2380.39 r118.11
  circle w10: c1571.65,1180.39 r118.11
  lines w10: 1471.63,1119.39 1471.63,1174.73 ; 1471.65,1171.74 1471.65,4338.74 ; 1471.68,1119.39 ccw(c1510.65,1119.39) 1509.65,1080.43 1571.6,1080.43 ; 1471.68,2418.6 ccw(c1510.65,2418.6) 1509.65,2379.65 1571.6,2379.64 ; 1571.65,1080.39 1671.65,980.39 2961.65,980.39 3061.65,1080.39 3511.65,1080.39 3571.65,1140.39 3571.65,4446.74 ; 1571.65,2379.6 1671.65,2279.6 2961.65,2279.6 3061.65,2379.6 3511.65,2379.6 3571.65,2439.6
  text "AI8" at 302.28,520.74 h40
  text "AI7" at 552.28,520.74 h40
  text "AI6" at 802.28,520.74 h40
  text "AI5" at 1052.28,520.74 h40
  text "PneuSoRD  / Arduino Due Adapter" at 1411.28,71.74 h80

## Text inside footprints (layer, text, board x,y; h text height)
J1: Top Overlay "34" at 44.54,2467.61 h40 r270; Top Overlay "33" at 144.54,2467.61 h40 r270; Top Overlay "1" at 144.54,689.26 h40 r270; Top Overlay "2" at 44.54,693.2 h40 r270
J6: Top Overlay "34" at 44.54,4727.65 h40 r270; Top Overlay "33" at 144.54,4727.65 h40 r270; Top Overlay "1" at 144.54,2949.3 h40 r270; Top Overlay "2" at 44.54,2953.24 h40 r270